# Altium PCB 宁波2号线PIS_数字功率放大器_网络音频(BHC-A-2030-02)_PCB(06001537)_V1.0.PcbDoc (part 4 of 7)
Units mm, origin at the board's own origin, x right, y up, seen from the top; angles counter-clockwise.
Board outline 86 x 96 mm, 4 copper layers (Top Layer, GND, VDD, Bottom Layer); 204 components, 185 nets, 781 pads, 267 vias.
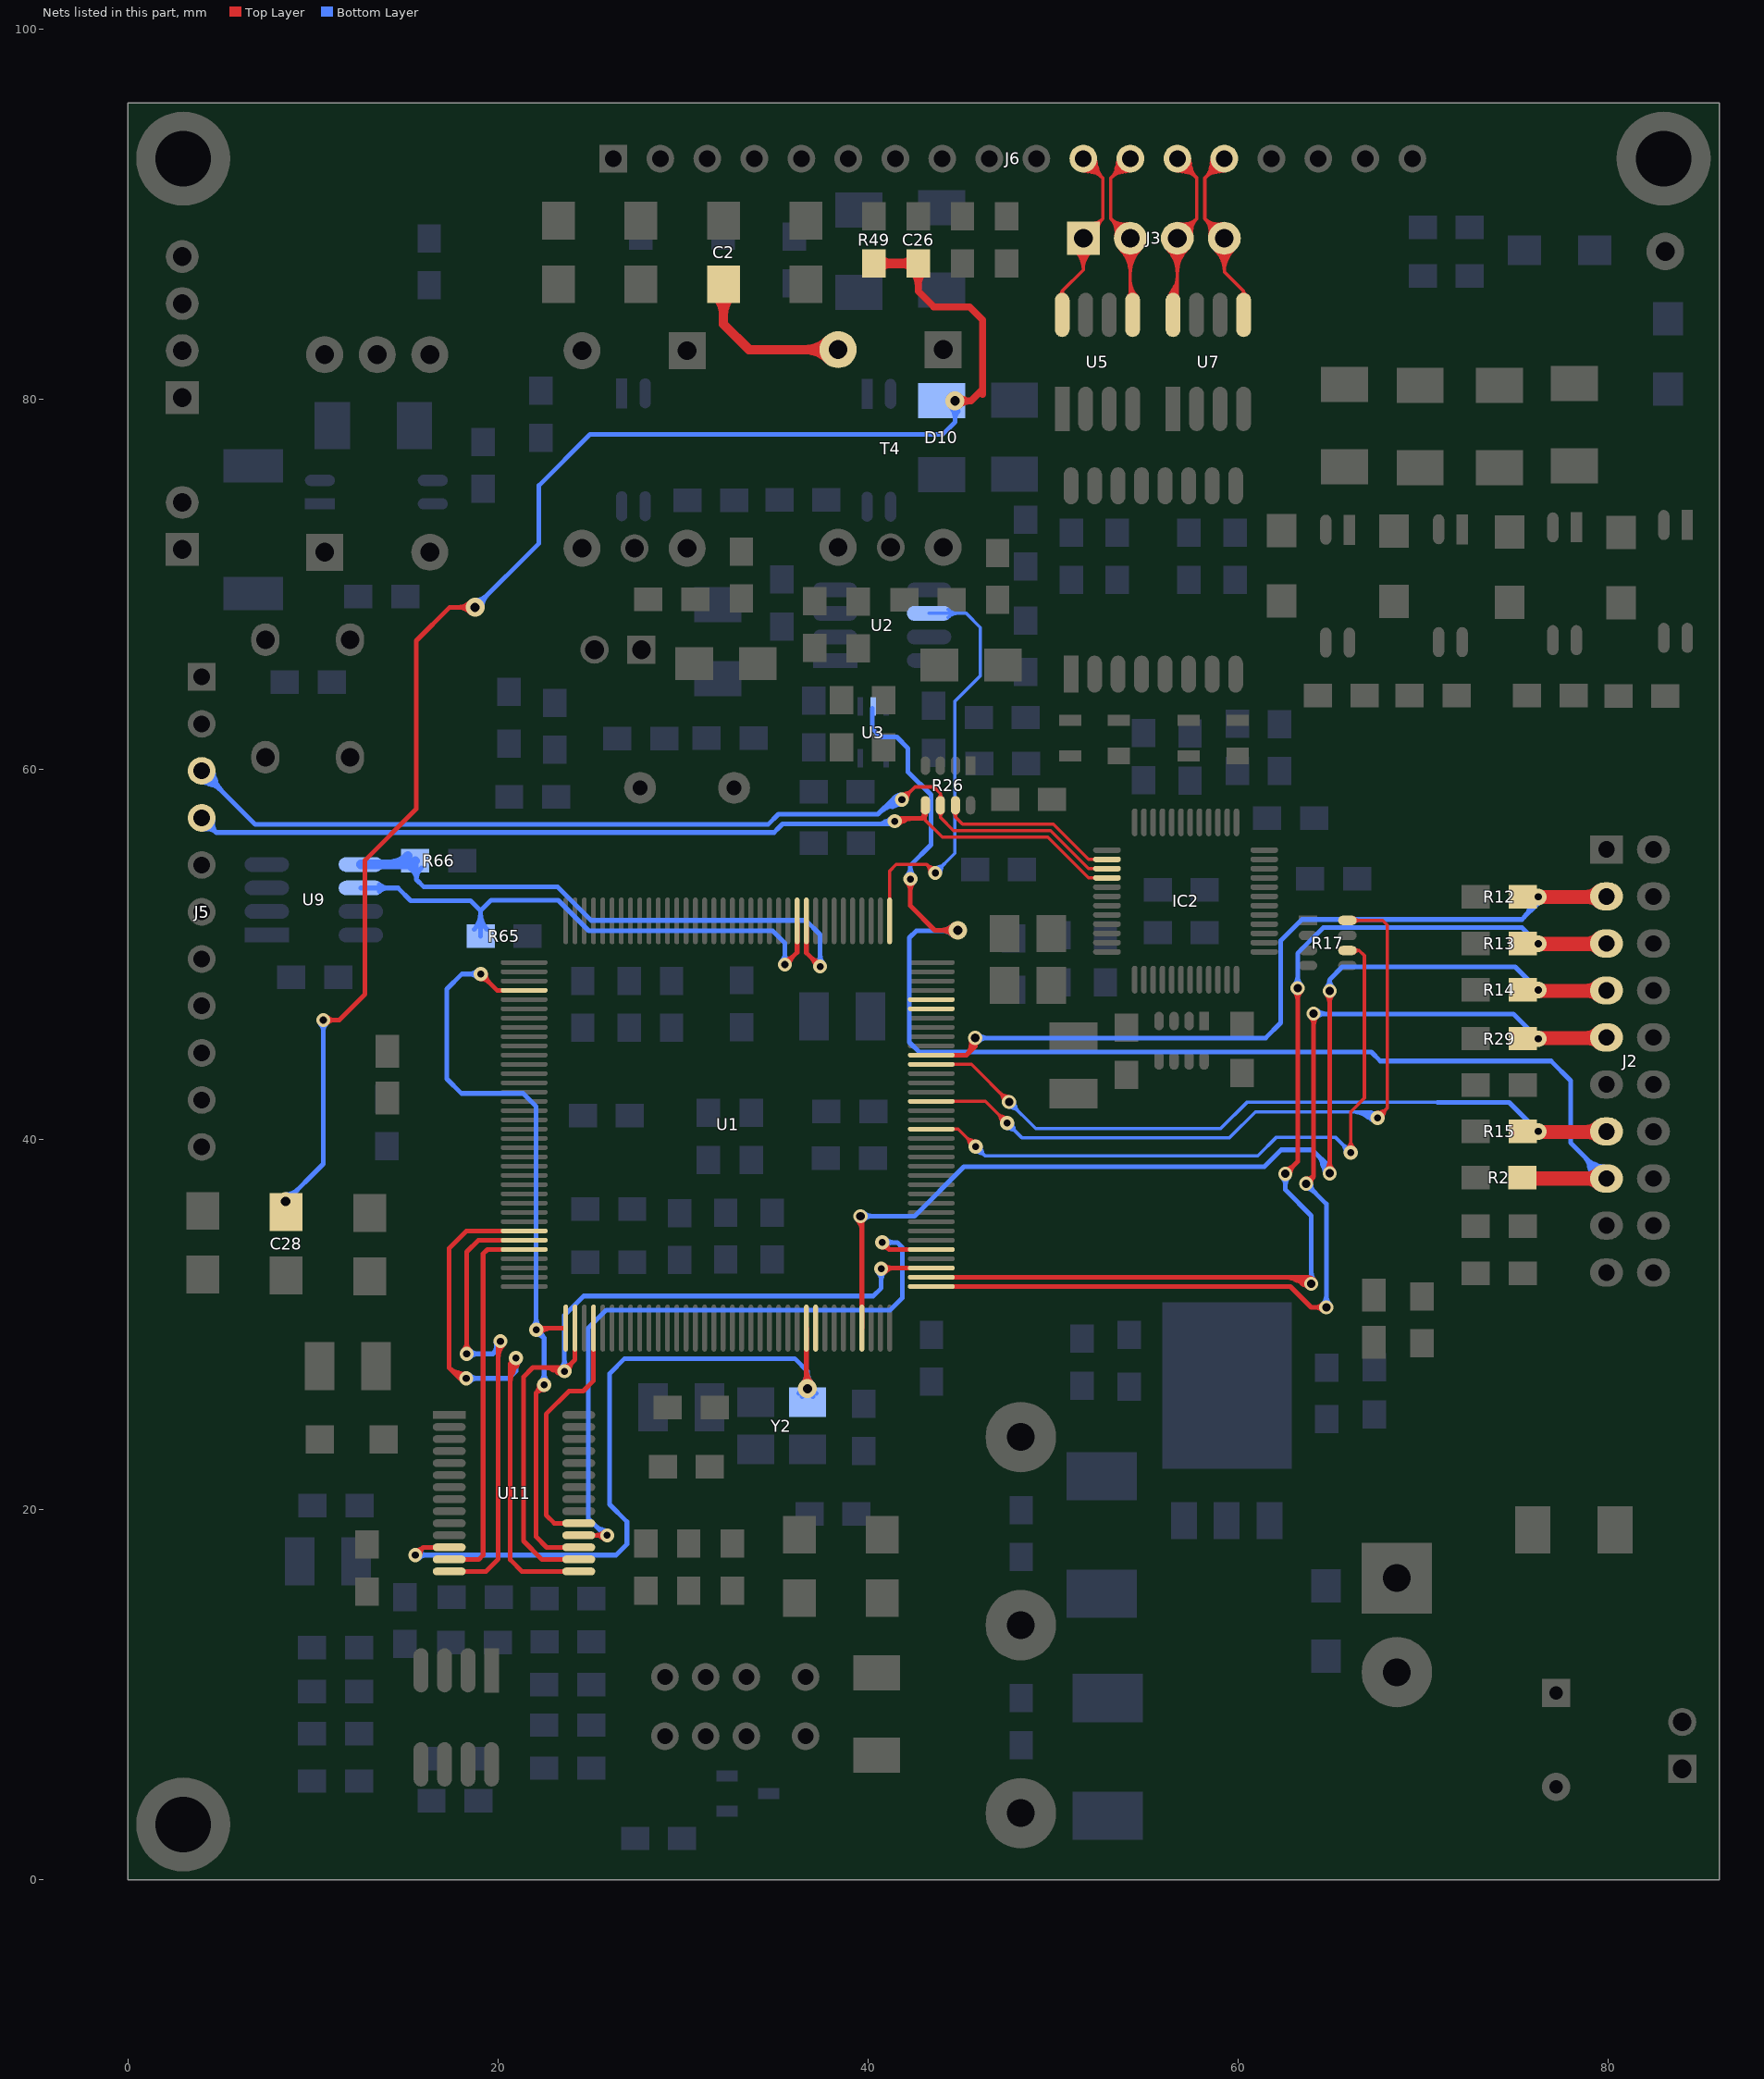
[diagram p6: the nets of this part, all layers, seen from the top]

## Via types
v1: diameter 1.016, hole 0.508, Top Layer to Bottom Layer, 122 vias
v2: diameter 0.762, hole 0.381, Top Layer to Bottom Layer, 48 vias
v3: diameter 0.889, hole 0.381, Top Layer to Bottom Layer, 37 vias
v4: diameter 1.27, hole 0.635, Top Layer to Bottom Layer, 28 vias
v5: diameter 1.27, hole 0.711, Top Layer to Bottom Layer, 20 vias
v6: diameter 0.762, hole 0.457, Top Layer to Bottom Layer, 11 vias
v7: diameter 1.143, hole 0.635, Top Layer to Bottom Layer, 1 vias

## Nets (pads, with @x,y where several pads share a name; then routed paths per layer and width w, separated by ;. In a path a pad name is that pad's centre, name@x,y a point inside that pad or via, vN(x,y) a via of type N, cw(c..) or ccw(c..) an arc to the next point about the centre after c; other vN are vias at no path point) (continued)
ETHTXD1: R17.8 U1.129 | length 59.5
  Top Layer w0.178: U1.129@43.423,42.066 46.351,42.066 v2(47.523,40.894) ; 47.159,41.163 ccw(c47.603,41.282) v2@47.511,40.832 ; 47.255,41.258 cw(c47.136,40.815) v2@47.586,40.907 ; R17.8@65.913,51.841 67.818,51.841 68.072,51.587 68.072,41.707 v2(67.539,41.173) ; v2@67.476,41.186 cw(c67.926,41.094) 67.807,41.538 ; v2@67.551,41.111 ccw(c67.459,41.561) 67.903,41.442 ; 47.025,41.393 cw(c46.526,40.894) 47.231,40.894 ccw(c46.526,40.894) 47.025,41.393 ; 47.025,41.393 ccw(c47.523,41.891) 47.523,41.186 cw(c47.523,41.891) 47.025,41.393 ; 66.558,51.841 cw(c66.558,52.24) 66.276,51.958 ccw(c66.558,52.24) 66.558,51.841 ; 66.558,51.841 ccw(c66.558,51.443) 66.276,51.725 cw(c66.558,51.443) 66.558,51.841 ; 68.037,41.672 cw(c67.539,42.171) 67.539,41.465 ccw(c67.539,42.171) 68.037,41.672 ; 68.037,41.672 ccw(c68.536,41.173) 67.831,41.173 cw(c68.536,41.173) 68.037,41.672
  Bottom Layer w0.178: v2@47.461,40.881 ccw(c47.911,40.973) 47.792,40.53 ; v2(47.523,40.894) 48.311,40.107 59.538,40.107 60.935,41.504 67.208,41.504 v2(67.539,41.173) ; v2@47.536,40.956 cw(c47.444,40.506) 47.888,40.625 ; 66.797,41.314 ccw(c67.025,41.666) v2@67.328,41.376 ; 66.884,41.424 ccw(c67.136,41.861) v2@67.391,41.425 ; 66.977,41.197 ccw(c67.183,41.514) v2@67.456,41.252 ; 67.104,41.297 cw(c66.939,41.013) v2@67.256,41.098 ; 67.149,41.271 ccw(c67.314,41.557) v2@67.481,41.272 ; 67.158,41.08 ccw(c67.341,41.363) v2@67.584,41.129 ; v2@67.249,41.214 ccw(c66.98,41.253) 67.116,41.488 ccw(c67.324,41.849) v2@67.45,41.452 ; 48.022,40.395 cw(c48.521,40.894) 47.816,40.894 ccw(c48.521,40.894) 48.022,40.395 ; 48.022,40.395 ccw(c47.523,39.897) 47.523,40.602 cw(c47.523,39.897) 48.022,40.395 ; 66.036,41.504 cw(c66.036,39.671) 67.332,40.967 ccw(c66.036,39.671) 66.036,41.504 ; 66.465,41.504 cw(c66.465,40.1) 67.458,41.093 ccw(c66.465,40.1) 66.465,41.504 ; 66.895,41.504 cw(c66.895,40.53) 67.584,41.218 ccw(c66.895,40.53) 66.895,41.504
ETHTXEN: R17.6 U1.126 | length 45.9
  Top Layer w0.178: U1.126@43.423,40.566 44.88,40.566 v2(45.822,39.624) ; 45.457,39.893 ccw(c45.901,40.012) v2@45.809,39.562 ; 45.553,39.988 cw(c45.434,39.545) v2@45.884,39.637 ; v2@65.884,39.5 ccw(c65.386,39.999) 66.091,39.999 ccw(c66.796,39.999) v2@66.297,39.5 ; R17.6@65.913,50.216 66.548,50.216 ; v2(66.091,39.294) 66.091,41.504 66.827,42.24 66.827,49.936 66.548,50.216 ; 45.323,40.123 cw(c44.824,39.624) 45.53,39.624 ccw(c44.824,39.624) 45.323,40.123 ; 45.323,40.123 ccw(c45.822,40.621) 45.822,39.916 cw(c45.822,40.621) 45.323,40.123 ; 66.548,50.216 cw(c66.548,50.591) 66.278,50.33 ccw(c66.548,50.591) 66.548,50.216 ; 66.548,50.216 ccw(c66.548,49.84) 66.278,50.101 cw(c66.548,49.84) 66.548,50.216
  Bottom Layer w0.178: v2@45.759,39.611 ccw(c46.209,39.703) 46.09,39.26 ; v2(45.822,39.624) 46.33,39.116 61.062,39.116 62.078,40.132 65.253,40.132 v2(66.091,39.294) ; v2@45.834,39.686 cw(c45.742,39.236) 46.186,39.355 ; v2@65.799,39.294 ccw(c65.094,39.294) 65.592,39.792 ccw(c66.091,40.291) v2@66.091,39.586 ; 46.32,39.125 cw(c46.819,39.624) 46.114,39.624 ccw(c46.819,39.624) 46.32,39.125 ; 46.32,39.125 ccw(c45.822,38.627) 45.822,39.332 cw(c45.822,38.627) 46.32,39.125
FEED_DOG: U1.1 U2.6 | length 30.3
  Top Layer w0.178: U1.1@41.173,51.816 41.173,54.508 41.529,54.864 43.18,54.864 ; 43.282,54.741 ccw(c43.805,54.846) v2@43.614,54.348 ; 43.303,54.762 cw(c43.198,54.239) v2@43.696,54.43 ; v2(43.637,54.407) 43.18,54.864 ; 43.18,54.864 cw(c42.777,54.461) 43.346,54.425 ccw(c42.777,54.461) 43.18,54.864 ; 43.18,54.864 ccw(c43.583,55.267) 43.619,54.698 cw(c43.583,55.267) 43.18,54.864
  Bottom Layer w0.178: U2.6@43.307,68.428 45.314,68.428 46.076,67.666 46.076,65.049 44.704,63.678 44.704,55.474 v2(43.637,54.407) ; v2@43.575,54.42 cw(c44.025,54.327) 43.906,54.771 ; v2@43.65,54.345 ccw(c43.558,54.794) 44.001,54.676 ; U2.6@44.327,68.208 cw(c44.858,67.677) 44.858,68.428 cw(c44.858,69.179) U2.6@44.327,68.648 ; 44.136,54.905 cw(c43.637,55.404) 43.637,54.699 ccw(c43.637,55.404) 44.136,54.905 ; 44.136,54.905 ccw(c44.634,54.407) 43.929,54.407 cw(c44.634,54.407) 44.136,54.905
I2C1_SCL: U1.139
I2C1_SDA: U1.140
I2C2_SCL: R65.2 U1.11 U9.6 | length 40.5
  Top Layer w0.254: 35.829,49.794 ccw(c35.944,49.365) v2(35.509,49.454) ; 35.849,49.774 cw(c35.42,49.889) v2(35.509,49.454) ; U1.11@36.173,51.816 36.173,50.118 v2(35.509,49.454) ; 35.943,49.887 cw(c35.509,50.321) 35.509,49.708 ccw(c35.509,50.321) 35.943,49.887 ; 35.943,49.887 ccw(c36.376,49.454) 35.763,49.454 cw(c36.376,49.454) 35.943,49.887
  Bottom Layer w0.254: U9.6@12.598,53.594 14.605,53.594 15.291,52.908 18.526,52.908 19.067,52.367 ; R65.2@19.067,50.994 19.067,52.367 ; v2(35.509,49.454) 35.509,50.622 34.849,51.283 24.917,51.283 23.266,52.934 19.634,52.934 19.067,52.367 ; 14.057,53.594 cw(c14.057,54.253) 13.591,53.787 ccw(c14.057,54.253) 14.057,53.594 ; 14.057,53.594 ccw(c14.057,52.935) 13.591,53.401 cw(c14.057,52.935) 14.057,53.594 ; 19.067,52.22 cw(c17.841,52.22) 18.708,51.353 ccw(c17.841,52.22) 19.067,52.22 ; 19.067,52.22 ccw(c20.294,52.22) 19.426,51.353 cw(c20.294,52.22) 19.067,52.22 ; 35.509,50.067 cw(c34.896,50.067) 35.33,49.633 ccw(c34.896,50.067) 35.509,50.067 ; 35.509,50.067 ccw(c36.122,50.067) 35.689,49.633 cw(c36.122,50.067) 35.509,50.067
I2C2_SDA: R66.2 U1.10 U9.5 | length 41.7
  Top Layer w0.254: U1.10@36.673,51.816 36.673,50.093 v2(37.414,49.352) ; 37.074,49.672 ccw(c37.503,49.787) v2(37.414,49.352) ; 37.094,49.692 cw(c36.979,49.263) v2(37.414,49.352) ; 36.981,49.786 cw(c36.547,49.352) 37.16,49.352 ccw(c36.547,49.352) 36.981,49.786 ; 36.981,49.786 ccw(c37.414,50.219) 37.414,49.606 cw(c37.414,50.219) 36.981,49.786
  Bottom Layer w0.254: R66.2@15.537,55.058 15.596,54.999 15.596,54.051 16.002,53.645 23.241,53.645 25.044,51.841 36.652,51.841 37.414,51.079 v2(37.414,49.352) ; 15.596,54.05 cw(c16.444,54.05) 15.876,54.68 ccw(c16.444,54.05) 15.596,54.05 ; 15.596,54.05 ccw(c14.924,54.05) 15.273,54.624 cw(c14.924,54.05) 15.596,54.05 ; 37.414,49.965 cw(c36.801,49.965) 37.235,49.532 ccw(c36.801,49.965) 37.414,49.965 ; 37.414,49.965 ccw(c38.027,49.965) 37.594,49.532 cw(c38.027,49.965) 37.414,49.965
  Bottom Layer w0.508: U9.5@12.598,54.864 15.343,54.864 R66.2@15.537,55.058 ; 14.022,54.864 ccw(c14.022,56.445) 15.14,55.327 cw(c14.022,56.445) 14.022,54.864
I2S2_CKIN: U1.99 U11.12 Y2.3 | length 57.7
  Top Layer w0.254: 15.88,17.892 cw(c15.427,18.002) v2(15.545,17.551) ; 15.886,17.886 ccw(c15.995,17.434) v2(15.545,17.551) ; U11.12@17.374,17.971 15.964,17.971 ; U1.99@36.673,29.816 36.673,26.598 v1(36.728,26.543) ; v2(15.545,17.551) 15.964,17.971 ; 15.964,17.971 cw(c15.565,18.37) 15.551,17.805 ccw(c15.565,18.37) 15.964,17.971 ; 15.964,17.971 ccw(c16.363,17.571) 15.799,17.558 cw(c16.363,17.571) 15.964,17.971 ; v1@36.459,26.812 ccw(c35.941,27.33) 36.673,27.33 cw(c35.941,27.33) v1@36.459,26.812 ; 36.673,27.596 ccw(c37.781,27.596) 36.998,26.812 cw(c37.781,27.596) 36.673,27.596
  Bottom Layer w0.254: v2(15.545,17.551) 26.391,17.551 26.975,18.136 26.975,19.355 26.035,20.295 26.035,27.356 26.848,28.169 36.043,28.169 36.728,27.483 v1(36.728,26.543) ; 16.158,17.551 cw(c16.158,18.165) 15.724,17.731 ccw(c16.158,18.165) 16.158,17.551 ; 16.158,17.551 ccw(c16.158,16.938) 15.724,17.372 cw(c16.158,16.938) 16.158,17.551 ; v1@36.728,26.818 cw(c35.717,26.818) 36.432,26.103 ccw(c35.717,26.818) v1@36.728,26.818 ; v1@36.728,26.818 ccw(c37.74,26.818) 37.025,26.103 cw(c37.74,26.818) v1@36.728,26.818 ; 36.728,27.431 cw(c35.104,27.431) 36.253,26.282 ccw(c35.104,27.431) 36.728,27.431 ; 36.728,27.431 ccw(c38.353,27.431) 37.204,26.282 cw(c38.353,27.431) 36.728,27.431 ; 36.728,27.463 cw(c35.809,27.463) 36.459,26.812 ccw(c35.809,27.463) 36.728,27.463 ; 36.728,27.463 ccw(c37.648,27.463) 36.998,26.812 cw(c37.648,27.463) 36.728,27.463
I2S2_SCK: U1.74 U1.111 U11.16 | length 54.4
  Top Layer w0.254: 22.954,27.571 ccw(c23.132,27.88) v2@23.404,27.648 ; 23.218,27.418 ccw(c23.368,27.678) v2(23.597,27.483) ; v2@23.749,27.686 24.173,28.11 U1.74@24.173,29.816 ; 23.886,27.814 ccw(c23.989,27.433) v2(23.597,27.483) ; 23.944,27.833 cw(c23.465,27.961) v2(23.597,27.483) ; U11.16@24.374,17.321 22.38,17.321 21.387,18.313 21.387,27.178 21.895,27.686 23.393,27.686 v2(23.597,27.483) ; v2@40.665,33.071 40.67,33.066 U1.111@43.423,33.066 ; v2(23.597,27.483) ccw(c23.106,26.992) 23.106,27.686 cw(c23.106,26.992) v2(23.597,27.483) ; 22.493,27.686 cw(c22.493,26.379) 23.417,27.303 ccw(c22.493,26.379) 22.493,27.686 ; v2@23.597,27.737 ccw(c23.597,28.227) 23.943,27.88 cw(c23.597,28.227) v2@23.597,27.737 ; v2@23.851,27.483 cw(c24.586,27.483) 24.066,28.003 ccw(c24.586,27.483) v2@23.851,27.483 ; v2@40.896,32.84 cw(c41.441,32.296) 41.441,33.066 ccw(c41.441,32.296) v2@40.896,32.84 ; v2@40.896,33.2 ccw(c41.218,33.522) 41.218,33.066 cw(c41.218,33.522) v2@40.896,33.2
  Bottom Layer w0.254: v2(23.597,27.483) 23.597,30.505 24.638,31.547 40.284,31.547 40.716,31.979 v2(40.716,33.02) ; 23.597,28.096 cw(c22.983,28.096) 23.417,27.662 ccw(c22.983,28.096) 23.597,28.096 ; 23.597,28.096 ccw(c24.21,28.096) 23.776,27.662 cw(c24.21,28.096) 23.597,28.096 ; 40.716,32.407 cw(c41.329,32.407) 40.896,32.84 ccw(c41.329,32.407) 40.716,32.407 ; 40.716,32.407 ccw(c40.103,32.407) 40.537,32.84 cw(c40.103,32.407) 40.716,32.407
I2S2_SD: U1.76 U11.19 | length 13.6
  Top Layer w0.254: U11.19@24.374,19.271 23.046,19.271 22.606,19.71 22.606,25.171 23.851,26.416 24.613,26.416 25.173,26.977 U1.76@25.173,29.816
I2S2_WS: U1.40 U1.73 U11.17 | length 58.4
  Top Layer w0.254: 19.395,48.606 cw(c19.51,49.035) v2(19.075,48.946) ; 19.415,48.626 ccw(c18.986,48.511) v2(19.075,48.946) ; U1.40@21.423,48.066 19.955,48.066 v2(19.075,48.946) ; v2(22.073,29.718) 22.171,29.816 U1.73@23.673,29.816 ; 22.165,26.424 cw(c22.597,26.31) v2(22.504,26.746) ; 22.182,26.407 ccw(c22.068,26.838) v2(22.504,26.746) ; U11.17@24.374,17.971 22.644,17.971 22.073,18.542 22.073,26.314 ; 19.509,48.512 cw(c19.943,48.946) 19.329,48.946 ccw(c19.943,48.946) 19.509,48.512 ; 19.509,48.512 ccw(c19.075,48.079) 19.075,48.692 cw(c19.075,48.079) 19.509,48.512 ; 22.073,26.314 cw(c22.502,25.885) 22.504,26.492 ccw(c22.502,25.885) 22.073,26.314 ; 22.073,26.314 ccw(c21.643,26.744) 22.25,26.745 cw(c21.643,26.744) 22.073,26.314 ; 22.073,26.314 v2(22.504,26.746) ; v2@22.252,29.538 cw(c22.922,28.868) 22.922,29.816 ccw(c22.922,28.868) v2@22.252,29.538 ; v2@22.252,29.898 ccw(c22.449,30.095) 22.449,29.816 cw(c22.449,30.095) v2@22.252,29.898
  Bottom Layer w0.254: v2(19.075,48.946) 18.059,48.946 17.247,48.133 17.247,43.282 18.034,42.494 21.361,42.494 22.073,41.783 v2(22.073,29.718) 22.504,29.286 ; v2(22.504,26.746) 22.504,29.286 ; 18.462,48.946 cw(c18.462,48.333) 18.896,48.766 ccw(c18.462,48.333) 18.462,48.946 ; 18.462,48.946 ccw(c18.462,49.559) 18.896,49.125 cw(c18.462,49.559) 18.462,48.946 ; 22.073,30.331 cw(c21.459,30.331) 21.893,29.898 ccw(c21.459,30.331) 22.073,30.331 ; 22.073,30.331 ccw(c22.686,30.331) 22.252,29.898 cw(c22.686,30.331) 22.073,30.331 ; 22.504,27.359 cw(c21.891,27.359) 22.325,26.926 ccw(c21.891,27.359) 22.504,27.359 ; 22.504,27.359 ccw(c23.118,27.359) 22.684,26.926 cw(c23.118,27.359) 22.504,27.359 ; 22.504,29.286 cw(c22.934,29.715) 22.327,29.717 ccw(c22.934,29.715) 22.504,29.286 ; 22.504,29.286 ccw(c22.075,28.857) 22.073,29.464 cw(c22.075,28.857) 22.504,29.286
I2S3_SD: U1.113 U11.18 | length 45.5
  Top Layer w0.254: U11.18@24.374,18.621 24.376,18.618 v2@26.086,18.618 ; v2(40.767,34.442) 41.143,34.066 ; U1.113@43.423,34.066 41.143,34.066 ; 25.295,18.618 cw(c25.295,18.005) 25.728,18.439 ccw(c25.295,18.005) 25.295,18.618 ; 25.295,18.618 ccw(c25.295,19.231) 25.728,18.798 cw(c25.295,19.231) 25.295,18.618 ; 41.143,34.066 cw(c41.448,34.371) 41.02,34.416 ccw(c41.448,34.371) 41.143,34.066 ; 41.143,34.066 ccw(c40.839,33.762) 40.794,34.19 cw(c40.839,33.762) 41.143,34.066
  Bottom Layer w0.254: 25.528,18.974 cw(c25.385,18.44) v2(25.908,18.618) ; v2@25.806,18.618 24.892,19.533 24.892,29.82 25.857,30.785 41.199,30.785 41.859,31.445 41.859,34.163 41.58,34.442 v2(40.767,34.442) ; 41.38,34.442 cw(c41.38,35.056) 40.947,34.622 ccw(c41.38,35.056) 41.38,34.442 ; 41.38,34.442 ccw(c41.38,33.829) 40.947,34.263 cw(c41.38,33.829) 41.38,34.442 ; 25.301,19.124 ccw(c25.908,19.731) 25.908,18.872 cw(c25.908,19.731) 25.301,19.124 ; 25.546,18.878 cw(c25.286,18.618) 25.654,18.618 ccw(c25.286,18.618) 25.546,18.878
I_SAMPLING_UDA1341TS: C26.2 C28.2 D10.K R49.2 | length 109.1
  Top Layer w0.254: C28.2@9.017,36.093 C28.2@9.038,36.114 ; v2(10.566,46.457) 11.43,46.457 12.827,47.854 12.827,55.093 15.596,57.861 15.596,66.954 17.399,68.758 v1(18.771,68.758) ; v2@10.746,46.277 cw(c11.18,45.843) 11.18,46.457 cw(c11.18,47.07) v2@10.746,46.636 ; 17.851,68.758 cw(c17.851,67.838) 18.501,68.488 ccw(c17.851,67.838) 17.851,68.758 ; 17.851,68.758 ccw(c17.851,69.678) 18.501,69.027 cw(c17.851,69.678) 17.851,68.758
  Top Layer w0.381: C26.2@42.716,87.334 42.716,85.833 43.561,84.988 45.491,84.988 46.203,84.277 46.203,80.543 ; v1(44.704,79.908) 45.568,79.908 46.203,80.543 ; 46.203,80.264 46.203,80.543 ; 42.716,86.134 cw(c43.789,86.134) 43.03,86.893 ccw(c43.789,86.134) 42.716,86.134 ; 42.716,86.134 ccw(c41.643,86.134) 42.402,86.893 cw(c41.643,86.134) 42.716,86.134 ; 45.471,79.908 cw(c45.471,80.675) 44.929,80.133 ccw(c45.471,80.675) 45.471,79.908 ; 45.471,79.908 ccw(c45.471,79.142) 44.929,79.684 cw(c45.471,79.142) 45.471,79.908
  Top Layer w0.508: R49.2@40.326,87.334 C26.2@42.716,87.334 ; 41.246,87.334 cw(c41.246,88.254) 40.595,87.604 ccw(c41.246,88.254) 41.246,87.334 ; 41.246,87.334 ccw(c41.246,86.415) 40.595,87.065 cw(c41.246,86.415) 41.246,87.334 ; 41.796,87.334 cw(c41.796,86.415) 42.447,87.065 ccw(c41.796,86.415) 41.796,87.334 ; 41.796,87.334 ccw(c41.796,88.254) 42.447,87.604 cw(c41.796,88.254) 41.796,87.334
  Bottom Layer w0.254: v1(8.534,36.652) 10.566,38.684 v2(10.566,46.457) ; v1@8.534,37.033 ccw(c8.534,37.953) 9.185,37.303 ccw(c9.835,36.652) v1@8.915,36.652 ; v2@10.387,46.277 cw(c9.953,45.843) 10.566,45.843 cw(c11.18,45.843) v2@10.746,46.277 ; v1(18.771,68.758) 22.225,72.212 22.225,75.336 24.994,78.105 44.044,78.105 44.704,78.765 v1(44.704,79.908) ; 19.421,69.408 cw(c18.771,70.059) 18.771,69.139 ccw(c18.771,70.059) 19.421,69.408 ; 19.421,69.408 ccw(c20.071,68.758) 19.152,68.758 cw(c20.071,68.758) 19.421,69.408 ; D10.K@44.704,78.989 cw(c45.624,78.989) 44.973,79.639 ccw(c45.624,78.989) D10.K@44.704,78.989 ; D10.K@44.704,78.989 ccw(c43.784,78.989) 44.435,79.639 cw(c43.784,78.989) D10.K@44.704,78.989 ; 44.704,78.916 cw(c45.309,78.916) 44.881,79.343 ccw(c45.309,78.916) 44.704,78.916
J_RST: J2.15 R2.2 U3.2 | length 98.7
  Top Layer w0.254: v2@42.291,54.204 42.291,52.629 43.612,51.308 v1(44.856,51.308) ; v1@44.587,51.039 ccw(c43.937,50.388) 43.937,51.308 ccw(c43.937,52.228) v1@44.587,51.577 ; 42.291,53.463 cw(c42.904,53.463) 42.471,53.897 ccw(c42.904,53.463) 42.291,53.463 ; 42.291,53.463 ccw(c41.678,53.463) 42.111,53.897 cw(c41.678,53.463) 42.291,53.463
  Top Layer w0.762: R2.2@75.37,37.938 75.411,37.897 J2.15@79.908,37.897 ; R2.2@75.677,38.118 ccw(c76.21,38.651) 76.21,37.897 ; 78.862,37.897 cw(c78.862,36.977) 79.512,37.627 ccw(c78.862,36.977) 78.862,37.897 ; 78.862,37.897 ccw(c78.862,38.817) 79.512,38.166 cw(c78.862,38.817) 78.862,37.897
  Bottom Layer w0.254: U3.2@40.244,63.297 40.244,62.194 40.691,61.747 41.554,61.747 42.164,61.138 42.164,59.868 43.409,58.623 43.409,55.931 42.291,54.813 v2@42.291,54.204 ; 43.875,51.283 ccw(c43.875,52.289) v1@44.587,51.577 ; 43.998,51.283 cw(c43.998,50.45) v1@44.587,51.039 ; v1@44.856,51.283 42.621,51.283 42.24,50.902 42.24,45.263 42.774,44.729 67.208,44.729 67.691,44.247 76.911,44.247 77.978,43.18 77.978,39.827 J2.15@79.908,37.897 ; 42.291,54.69 cw(c41.678,54.69) 42.111,54.256 ccw(c41.678,54.69) 42.291,54.69 ; 42.291,54.69 ccw(c42.904,54.69) 42.471,54.256 cw(c42.904,54.69) 42.291,54.69 ; 78.608,39.198 cw(c77.307,37.897) J2.15@79.146,37.897 ; 78.608,39.198 cw(c77.307,37.897) J2.15@79.146,37.897 ; 78.608,39.198 cw(c77.307,37.897) J2.15@79.146,37.897 ; 78.914,38.891 ccw(c79.781,39.758) J2.15@79.781,38.532 ; 78.914,38.891 ccw(c79.781,39.758) J2.15@79.781,38.532 ; 78.914,38.891 ccw(c79.781,39.758) J2.15@79.781,38.532 ; 78.969,38.558 ccw(c80.042,38.846) J2.15@79.748,37.774 ; 78.969,38.558 ccw(c80.042,38.846) J2.15@79.748,37.774 ; 78.969,38.558 ccw(c80.042,38.846) J2.15@79.748,37.774 ; 79.041,38.764 cw(c78.174,37.897) J2.15@79.4,37.897 ; 79.041,38.764 cw(c78.174,37.897) J2.15@79.4,37.897 ; 79.041,38.764 cw(c78.174,37.897) J2.15@79.4,37.897 ; 79.24,38.677 cw(c79.004,37.797) J2.15@79.907,37.913 ; 79.24,38.677 cw(c79.004,37.797) J2.15@79.907,37.913 ; 79.24,38.677 cw(c79.004,37.797) J2.15@79.907,37.913
  other v2: 42.291,54.077
JNRST: J2.3 R12.1 U1.134 | length 60.5
  Top Layer w0.254: U1.134@43.423,44.566 45.328,44.566 ; 45.558,44.896 cw(c46.396,44.907) v6(45.796,45.491) ; 45.328,44.566 ccw(c44.709,45.185) 45.552,45.423 cw(c44.709,45.185) 45.328,44.566 ; 45.328,44.566 45.796,45.034 ; 45.796,45.034 cw(c46.081,45.034) 45.93,45.276 ccw(c46.081,45.034) 45.796,45.034 ; 45.796,45.034 ccw(c45.512,45.034) 45.662,45.276 cw(c45.512,45.034) 45.796,45.034 ; 45.796,45.034 v6(45.796,45.491) ; v6(45.796,45.491) cw(c45.187,45.32) 45.635,44.873 ccw(c45.187,45.32) v6(45.796,45.491)
  Top Layer w0.762: R12.1@75.379,53.106 J2.3@79.877,53.106 ; R12.1@75.686,53.3 ccw(c76.156,53.771) 76.156,53.106 cw(c76.156,53.771) R12.1@75.686,53.3 ; 78.786,53.106 ccw(c78.786,54.132) 79.512,53.406 cw(c78.786,54.132) 78.786,53.106 ; 78.937,53.106 cw(c78.937,52.292) 79.512,52.867 ccw(c78.937,52.292) 78.937,53.106
  Bottom Layer w0.254: v6(45.796,45.491) 61.493,45.491 62.306,46.304 62.306,50.749 63.449,51.892 75.336,51.892 76.225,52.781 v3(76.225,53.111) ; 75.711,52.376 cw(c76.757,52.095) v3@76.255,53.055 ; v3@75.951,52.951 cw(c75.478,52.675) 76.007,52.534 cw(c76.365,52.438) v3@76.29,52.801 ; 46.409,45.491 cw(c46.409,46.105) 45.976,45.671 ccw(c46.409,46.105) 46.409,45.491 ; 46.409,45.491 ccw(c46.409,44.878) 45.976,45.312 cw(c46.409,44.878) 46.409,45.491 ; 75.45,52.006 ccw(c74.344,53.111) 75.908,53.111 cw(c74.344,53.111) 75.45,52.006 ; 75.884,52.439 ccw(c75.211,53.111) 76.162,53.111 cw(c75.211,53.111) 75.884,52.439
JTCK: J2.9 R29.2 U1.109 | length 74.3
  Top Layer w0.254: U1.109@43.423,32.066 62.825,32.066 63.954,30.937 v6(64.77,30.937) ; 64.009,37.984 cw(c63.524,38.089) v6(63.678,37.617) ; 64.044,37.948 ccw(c64.15,37.463) v6(63.678,37.617) ; v6(64.084,46.812) 64.084,38.024 ; v6(63.678,37.617) 64.084,38.024 ; 64.084,38.024 cw(c63.714,38.394) 63.69,37.871 ccw(c63.714,38.394) 64.084,38.024 ; 64.084,38.024 ccw(c64.454,37.654) 63.932,37.629 cw(c64.454,37.654) 64.084,38.024 ; 64.084,46.199 cw(c64.697,46.199) 64.264,46.633 ccw(c64.697,46.199) 64.084,46.199 ; 64.084,46.199 ccw(c63.471,46.199) 63.905,46.633 cw(c63.471,46.199) 64.084,46.199 ; 64.157,30.937 cw(c64.157,30.324) 64.59,30.758 ccw(c64.157,30.324) 64.157,30.937 ; 64.157,30.937 ccw(c64.157,31.55) 64.59,31.117 cw(c64.157,31.55) 64.157,30.937
  Top Layer w0.762: R29.2@75.379,45.486 J2.9@79.877,45.486 ; R29.2@75.686,45.277 cw(c76.189,44.773) 76.189,45.486 ccw(c76.189,44.773) R29.2@75.686,45.277 ; 78.786,45.486 ccw(c78.786,46.512) 79.512,45.786 cw(c78.786,46.512) 78.786,45.486 ; 78.937,45.486 cw(c78.937,44.672) 79.512,45.247 ccw(c78.937,44.672) 78.937,45.486
  Bottom Layer w0.254: v6(63.678,37.617) 64.77,36.525 v6(64.77,30.937) ; v6(64.084,46.812) 64.11,46.787 74.886,46.787 v3(76.225,45.447) ; 64.111,37.184 cw(c64.545,37.617) 63.932,37.617 ccw(c64.545,37.617) 64.111,37.184 ; 64.111,37.184 ccw(c63.678,36.75) 63.678,37.363 cw(c63.678,36.75) 64.111,37.184 ; 64.77,31.55 cw(c64.157,31.55) 64.59,31.117 ccw(c64.157,31.55) 64.77,31.55 ; 64.77,31.55 ccw(c65.383,31.55) 64.95,31.117 cw(c65.383,31.55) 64.77,31.55 ; 75.683,45.989 cw(c75.141,45.447) 75.908,45.447 ccw(c75.141,45.447) 75.683,45.989 ; 75.683,45.989 ccw(c76.225,46.531) 76.225,45.765 cw(c76.225,46.531) 75.683,45.989 ; v6@64.264,46.633 cw(c64.636,46.26) 64.636,46.787 ccw(c64.636,46.26) v6@64.264,46.633 ; v6@64.264,46.992 ccw(c64.759,47.487) 64.759,46.787 cw(c64.759,47.487) v6@64.264,46.992
JTDI: J2.5 R13.2 U1.110 | length 84.3
  Top Layer w0.254: U1.110@43.423,32.566 63.598,32.566 ; 62.88,38.491 ccw(c62.995,38.062) v6(62.56,38.151) ; 62.9,38.471 cw(c62.471,38.586) v6(62.56,38.151) ; 63.076,32.433 ccw(c63.458,33.094) v6@63.833,32.429 ; v6(63.221,48.184) 63.221,38.811 v6(62.56,38.151) ; 63.462,32.21 ccw(c63.712,32.643) v6(63.957,32.207) ; v6@63.712,32.141 ccw(c63.12,31.983) 63.426,32.514 ccw(c63.733,33.045) v6@63.891,32.453 ; 62.994,38.584 cw(c62.56,39.018) 62.56,38.405 ccw(c62.56,39.018) 62.994,38.584 ; 62.994,38.584 ccw(c63.427,38.151) 62.814,38.151 cw(c63.427,38.151) 62.994,38.584 ; 63.221,47.571 cw(c63.834,47.571) 63.4,48.004 ccw(c63.834,47.571) 63.221,47.571 ; 63.221,47.571 ccw(c62.607,47.571) 63.041,48.004 cw(c62.607,47.571) 63.221,47.571 ; 63.598,32.566 cw(c63.33,32.297) 63.706,32.243 ccw(c63.33,32.297) 63.598,32.566 ; 63.598,32.566 ccw(c63.867,32.835) 63.921,32.459 cw(c63.867,32.835) 63.598,32.566 ; 63.598,32.566 v6(63.957,32.207) ; v6(63.957,32.207) ccw(c63.091,31.341) 63.091,32.566 cw(c63.091,31.341) v6(63.957,32.207) ; 62.478,32.566 cw(c62.478,30.728) 63.778,32.028 ccw(c62.478,30.728) 62.478,32.566 ; 63.704,32.566 cw(c63.704,31.954) 64.137,32.387 ccw(c63.704,31.954) 63.704,32.566
  Top Layer w0.762: R13.2@75.379,50.566 J2.5@79.877,50.566 ; R13.2@75.686,50.767 ccw(c76.172,51.253) 76.172,50.566 cw(c76.172,51.253) R13.2@75.686,50.767 ; 78.786,50.566 ccw(c78.786,51.592) 79.512,50.866 cw(c78.786,51.592) 78.786,50.566 ; 78.937,50.566 cw(c78.937,49.752) 79.512,50.327 ccw(c78.937,49.752) 78.937,50.566
  Bottom Layer w0.254: v6(62.56,38.151) 62.56,37.287 63.957,35.89 v6(63.957,32.207) ; v6(63.221,48.184) 63.221,50.063 64.618,51.46 75.343,51.46 v3(76.225,50.578) ; 62.56,37.538 cw(c63.173,37.538) 62.74,37.971 ccw(c63.173,37.538) 62.56,37.538 ; 62.56,37.538 ccw(c61.947,37.538) 62.381,37.971 cw(c61.947,37.538) 62.56,37.538 ; 63.221,48.797 cw(c62.607,48.797) 63.041,48.363 ccw(c62.607,48.797) 63.221,48.797 ; 63.221,48.797 ccw(c63.834,48.797) 63.4,48.363 cw(c63.834,48.797) 63.221,48.797 ; 63.957,32.82 cw(c63.344,32.82) 63.778,32.387 ccw(c63.344,32.82) 63.957,32.82 ; 63.957,32.82 ccw(c64.57,32.82) 64.137,32.387 cw(c64.57,32.82) 63.957,32.82 ; 75.683,51.12 cw(c75.141,50.578) 75.908,50.578 ccw(c75.141,50.578) 75.683,51.12 ; 75.683,51.12 ccw(c76.225,51.662) 76.225,50.896 cw(c76.225,51.662) 75.683,51.12
JTDO: J2.13 R15.1 U1.133 | length 52.9
  Top Layer w0.178: U1.133@43.423,44.066 45.596,44.066 v6(47.625,42.037) ; 47.261,42.306 ccw(c47.704,42.425) v6@47.612,41.975 ; 47.356,42.401 cw(c47.237,41.958) v6@47.687,42.05 ; 47.126,42.536 cw(c46.628,42.037) 47.333,42.037 ccw(c46.628,42.037) 47.126,42.536 ; 47.126,42.536 ccw(c47.625,43.034) 47.625,42.329 cw(c47.625,43.034) 47.126,42.536
  Top Layer w0.762: R15.1@75.379,40.406 J2.13@79.877,40.406 ; R15.1@75.686,40.626 ccw(c76.217,41.158) 76.217,40.406 cw(c76.217,41.158) R15.1@75.686,40.626 ; 78.786,40.406 ccw(c78.786,41.432) 79.512,40.706 cw(c78.786,41.432) 78.786,40.406 ; 78.937,40.406 cw(c78.937,39.592) 79.512,40.167 ccw(c78.937,39.592) 78.937,40.406
  Bottom Layer w0.178: v6@47.563,42.024 ccw(c48.013,42.116) 47.894,41.673 ; v6(47.625,42.037) 49.073,40.589 49.632,40.589 59.055,40.589 60.477,42.012 70.79,42.012 ; v6@47.638,42.099 cw(c47.546,41.649) 47.989,41.768 ; 48.124,41.538 cw(c48.622,42.037) 47.917,42.037 ccw(c48.622,42.037) 48.124,41.538 ; 48.124,41.538 ccw(c47.625,41.04) 47.625,41.745 cw(c47.625,41.04) 48.124,41.538
  Bottom Layer w0.254: 70.79,42.012 74.651,42.012 v3(76.225,40.437) ; 75.683,40.979 cw(c75.141,40.437) 75.908,40.437 ccw(c75.141,40.437) 75.683,40.979 ; 75.683,40.979 ccw(c76.225,41.521) 76.225,40.754 cw(c76.225,41.521) 75.683,40.979
JTMS: J2.7 R14.1 U1.105 | length 79.6
  Top Layer w0.254: v6@39.419,35.685 cw(c38.805,35.071) 39.673,35.071 ; v6(39.599,35.865) 39.673,35.79 U1.105@39.673,29.816 ; 39.673,35.432 cw(c40.031,35.432) v6@39.778,35.685 ; v6(64.948,38.176) v6(64.948,48.031) ; 64.948,38.789 cw(c64.335,38.789) 64.768,38.356 ccw(c64.335,38.789) 64.948,38.789 ; 64.948,38.789 ccw(c65.561,38.789) 65.127,38.356 cw(c65.561,38.789) 64.948,38.789 ; 64.948,47.418 cw(c65.561,47.418) 65.127,47.852 ccw(c65.561,47.418) 64.948,47.418 ; 64.948,47.418 ccw(c64.335,47.418) 64.768,47.852 cw(c64.335,47.418) 64.948,47.418
  Top Layer w0.762: R14.1@75.379,48.026 J2.7@79.877,48.026 ; R14.1@75.686,48.271 ccw(c76.279,48.864) 76.279,48.026 cw(c76.279,48.864) R14.1@75.686,48.271 ; 78.786,48.026 ccw(c78.786,49.052) 79.512,48.326 cw(c78.786,49.052) 78.786,48.026 ; 78.937,48.026 cw(c78.937,47.212) 79.512,47.787 ccw(c78.937,47.212) 78.937,48.026
  Bottom Layer w0.254: v6(39.599,35.865) 42.52,35.865 45.187,38.532 61.417,38.532 62.332,39.446 64.008,39.446 64.948,38.506 v6(64.948,38.176) ; v6@39.778,35.685 cw(c40.212,35.252) 40.212,35.865 cw(c40.212,36.478) v6@39.778,36.044 ; 64.558,38.685 ccw(c65.367,38.902) v6(64.948,38.176) ; v6@64.779,38.366 ccw(c64.64,38.521) 64.841,38.575 ccw(c65.042,38.629) v6@65,38.425 ; v6(64.948,48.031) 64.948,48.641 ; v3(76.225,48.082) 74.981,49.327 65.634,49.327 64.948,48.641 ; v6(64.948,38.176) ccw(c64.151,38.176) 64.714,38.74 cw(c64.151,38.176) v6(64.948,38.176) ; 64.948,48.641 cw(c64.343,48.641) 64.769,48.212 ccw(c64.343,48.641) 64.948,48.641 ; 64.948,48.641 ccw(c65.552,48.641) 65.127,48.212 cw(c65.552,48.641) 64.948,48.641 ; 75.683,48.624 cw(c75.141,48.082) 75.908,48.082 ccw(c75.141,48.082) 75.683,48.624 ; 75.683,48.624 ccw(c76.225,49.166) 76.225,48.4 cw(c76.225,49.166) 75.683,48.624 ; 64.281,39.173 cw(c63.283,38.176) 64.694,38.176 ccw(c63.283,38.176) 64.281,39.173
L3CLK: U1.67 U11.14 | length 33.6
  Top Layer w0.254: U11.14@17.374,16.671 19.355,16.671 20.015,17.331 20.015,28.981 v2(20.142,29.108) ; v2(18.313,28.423) 18.313,33.931 18.948,34.566 U1.67@21.423,34.566 ; 18.313,29.036 cw(c17.7,29.036) 18.134,28.602 ccw(c17.7,29.036) 18.313,29.036 ; 18.313,29.036 ccw(c18.927,29.036) 18.493,28.602 cw(c18.927,29.036) 18.313,29.036 ; 20.015,28.189 cw(c21.062,28.189) 20.322,28.929 ccw(c21.062,28.189) 20.015,28.189
  Bottom Layer w0.254: v2(18.313,28.423) 19.736,28.423 ; 18.927,28.423 cw(c18.927,29.036) 18.493,28.602 ccw(c18.927,29.036) 18.927,28.423 ; 18.927,28.423 ccw(c18.927,27.809) 18.493,28.243 cw(c18.927,27.809) 18.927,28.423 ; 19.736,28.423 ccw(c19.289,28.87) 19.898,29.04 cw(c19.289,28.87) 19.736,28.423 ; 19.736,28.423 20.142,28.829 v2(20.142,29.108) ; v2(20.142,29.108) cw(c19.769,29.004) 20.043,28.73 ccw(c19.769,29.004) v2(20.142,29.108)
L3DATA: U1.66 U11.15 | length 45.4
  Top Layer w0.254: 17.737,27.429 cw(c17.617,26.6) v2(18.288,27.102) ; v2@20.742,28.105 cw(c20.326,27.95) 20.711,27.728 cw(c21.096,27.505) v2@21.022,27.943 ; v2@20.773,28.047 cw(c20.279,27.698) 20.803,27.396 ; 21.001,27.739 ccw(c20.636,27.95) v2(20.98,28.194) ; U1.66@21.423,35.066 18.302,35.066 17.374,34.138 17.374,27.661 ; U11.15@24.374,16.671 21.302,16.671 20.676,17.297 20.676,27.889 ; 17.374,27.661 ccw(c18.132,28.419) 18.258,27.354 cw(c18.132,28.419) 17.374,27.661 ; 17.374,27.661 17.932,27.102 v2(18.288,27.102) ; v2(18.288,27.102) cw(c18.21,27.757) 17.744,27.29 ccw(c18.21,27.757) v2(18.288,27.102) ; 20.676,27.889 cw(c20.844,27.72) 20.91,27.95 ccw(c20.844,27.72) 20.676,27.889 ; 20.676,27.889 ccw(c20.507,28.058) 20.736,28.124 cw(c20.507,28.058) 20.676,27.889 ; 20.676,27.889 v2(20.98,28.194) ; v2(20.98,28.194) ccw(c21.716,27.458) 20.676,27.458 cw(c21.716,27.458) v2(20.98,28.194) ; 20.676,26.845 cw(c22.329,26.845) 21.16,28.014 ccw(c22.329,26.845) 20.676,26.845
  Bottom Layer w0.254: v2(18.288,27.102) 20.599,27.102 20.98,27.483 v2(20.98,28.194) ; 18.901,27.102 cw(c18.901,27.715) 18.468,27.281 ccw(c18.901,27.715) 18.901,27.102 ; 18.901,27.102 ccw(c18.901,26.489) 18.468,26.922 cw(c18.901,26.489) 18.901,27.102 ; 20.98,27.581 cw(c21.594,27.581) 21.16,28.014 ccw(c21.594,27.581) 20.98,27.581 ; 20.98,27.581 ccw(c20.367,27.581) 20.801,28.014 cw(c20.367,27.581) 20.98,27.581
L3MODE: U1.68 U11.13 | length 20.5
  Top Layer w0.254: U11.13@17.374,17.321 18.974,17.321 19.202,17.549 19.202,33.833 19.436,34.066 U1.68@21.423,34.066
LEDACT: IC2.26 R26.7 | length 11
  Top Layer w0.178: R26.7@44.729,58.064 44.729,57.429 ; IC2.26@52.917,55.14 51.921,55.14 50.013,57.048 45.11,57.048 44.729,57.429 ; 44.729,57.429 cw(c45.105,57.429) 44.844,57.7 ccw(c45.105,57.429) 44.729,57.429 ; 44.729,57.429 ccw(c44.354,57.429) 44.615,57.7 cw(c44.354,57.429) 44.729,57.429
LEDLINK: IC2.28 J5.4 R26.5 | length 64.5
  Top Layer w0.178: R26.5@43.104,58.064 43.104,57.531 ; IC2.28@52.917,54.14 51.916,54.14 49.718,56.337 44.018,56.337 43.104,57.252 43.104,57.531 ; R26.5@43.021,57.676 cw(c42.936,57.531) 43.104,57.531 ; R26.5@43.021,57.676 cw(c42.936,57.531) 43.104,57.531 ; R26.5@43.021,57.676 cw(c42.936,57.531) 43.104,57.531 ; R26.5@43.021,57.676 cw(c42.936,57.531) 43.104,57.531 ; 43.104,57.42 cw(c43.502,57.42) 43.221,57.702 ccw(c43.502,57.42) 43.104,57.42 ; 43.104,57.42 ccw(c42.705,57.42) 42.987,57.702 cw(c42.705,57.42) 43.104,57.42 ; 43.104,57.531 cw(c43.271,57.531) R26.5@43.187,57.676 ; 43.104,57.531 cw(c43.271,57.531) R26.5@43.187,57.676 ; 43.104,57.531 cw(c43.271,57.531) R26.5@43.187,57.676 ; 43.104,57.531 cw(c43.271,57.531) R26.5@43.187,57.676
  Top Layer w0.254: v2@41.67,57.333 ccw(c41.889,57.466) 42.018,57.244 ; 43.104,57.531 42.926,57.353 ; v2(41.453,57.201) cw(c41.821,56.833) 41.821,57.353 ccw(c41.821,56.833) v2(41.453,57.201) ; v2(41.453,57.201) 41.758,57.201 41.91,57.353 ; 41.91,57.353 ccw(c41.91,57.147) 41.705,57.171 cw(c41.91,57.147) 41.91,57.353 ; 41.91,57.353 42.926,57.353 ; 42.926,57.353 ccw(c42.678,57.601) 42.991,57.761 cw(c42.678,57.601) 42.926,57.353 ; v2@41.632,57.021 cw(c42.434,56.22) 42.434,57.353 ccw(c42.434,56.22) v2@41.632,57.021
  Bottom Layer w0.254: J5.4@4,57.38 4.531,56.849 4.789,56.591 ; 40.888,57.158 cw(c41.016,56.935) v2@41.236,57.069 ; v2@41.351,57.048 35.382,57.048 35.183,56.849 34.925,56.591 4.789,56.591 ; 4.789,56.591 cw(c5.275,57.077) 4.606,57.236 ccw(c5.275,57.077) 4.789,56.591 ; 4.789,56.591 ccw(c4.303,56.105) 4.144,56.774 cw(c4.303,56.105) 4.789,56.591 ; 40.472,57.048 ccw(c40.472,58.182) 41.273,57.38 cw(c40.472,58.182) 40.472,57.048 ; 41.085,57.048 ccw(c41.085,57.569) v2(41.453,57.201) cw(c41.085,57.569) 41.085,57.048
LEDSPEED: IC2.27 J5.3 R26.6 | length 77.7
  Top Layer w0.178: v2@41.772,58.384 cw(c42.238,58.274) 42.114,58.736 ; v2(41.834,58.369) 41.885,58.369 41.885,58.395 42.545,59.055 43.561,59.055 43.917,58.699 ; v2@41.845,58.307 ccw(c41.77,58.74) 42.195,58.626 ; IC2.27@52.917,54.64 51.919,54.64 49.865,56.693 44.628,56.693 43.917,57.404 R26.6@43.917,58.064 43.917,58.699 ; 43.917,57.42 cw(c44.315,57.42) 44.033,57.702 ccw(c44.315,57.42) 43.917,57.42 ; 43.917,57.42 ccw(c43.518,57.42) 43.8,57.702 cw(c43.518,57.42) 43.917,57.42 ; 43.917,58.699 cw(c43.541,58.699) 43.802,58.429 ccw(c43.541,58.699) 43.917,58.699 ; 43.917,58.699 ccw(c44.292,58.699) 44.031,58.429 cw(c44.292,58.699) 43.917,58.699 ; v2@41.834,58.661 ccw(c41.834,59.428) 42.376,58.886 cw(c41.834,59.428) v2@41.834,58.661 ; v2@42.126,58.369 cw(c42.77,58.369) 42.314,58.824 ccw(c42.77,58.369) v2@42.126,58.369
  Bottom Layer w0.254: J5.3@3.864,59.892 ccw(c4.82,60.088) 4.568,59.145 ; J5.3@4,59.92 6.897,57.023 34.602,57.023 35.161,57.582 40.538,57.582 ; J5.3@4.028,60.056 cw(c3.832,59.1) 4.775,59.352 ; 41.324,57.981 ccw(c41.11,58.791) v2(41.834,58.369) ; v2@41.614,58.497 cw(c41.084,58.806) 41.241,58.213 cw(c41.397,57.62) v2@41.706,58.15 ; 4.63,59.29 cw(c5.26,59.92) 4.369,59.92 ccw(c5.26,59.92) 4.63,59.29 ; 4.63,59.29 ccw(c4,58.66) 4,59.551 cw(c4,58.66) 4.63,59.29 ; 5.064,58.856 cw(c6.127,59.92) 4.623,59.92 ccw(c6.127,59.92) 5.064,58.856 ; 5.064,58.856 ccw(c4,57.793) 4,59.297 cw(c4,57.793) 5.064,58.856 ; 40.538,57.582 cw(c41.826,56.294) 41.833,58.115 ccw(c41.826,56.294) 40.538,57.582 ; 40.538,57.582 41.326,58.369 ; 41.326,58.369 cw(c41.326,57.988) 41.631,58.217 ccw(c41.326,57.988) 41.326,58.369 ; 41.326,58.369 ccw(c41.326,58.75) 41.631,58.522 cw(c41.326,58.75) 41.326,58.369 ; 41.326,58.369 v2(41.834,58.369) ; v2(41.834,58.369) ccw(c41.829,57.154) 40.97,58.013 cw(c41.829,57.154) v2(41.834,58.369) ; 41.401,58.445 cw(c41.832,58.013) 41.835,58.623 ccw(c41.832,58.013) 41.401,58.445
MB_RX_N: J3.4 J6.14 U7.5 | length 62.3
  Top Layer w0.178: 58.484,92.43 cw(c59.526,92.205) J6.14@59.188,93.216 ; 58.55,92.735 cw(c59.411,92.549) J6.14@59.131,93.385 ; 58.674,92.496 cw(c59.372,92.345) J6.14@59.252,93.049 ; 58.69,92.224 ccw(c58.465,93.266) J6.14@59.476,92.928 ; 58.756,92.414 ccw(c58.605,93.112) J6.14@59.309,92.991 ; J3.4@58.84,88.236 cw(c57.98,87.29) 59.258,87.29 cw(c60.537,87.29) J3.4@59.677,88.236 ; 58.995,92.289 ccw(c58.809,93.151) J6.14@59.645,92.871 ; J6.14@59.26,93 58.206,91.946 ; U7.5@60.3,84.557 60.3,85.847 ; U7.5@60.528,84.301 U7.5@60.528,85.592 ; 58.206,89.749 cw(c57.51,89.053) J3.4@58.474,88.857 ; 58.206,89.749 ccw(c58.901,90.444) J3.4@59.098,89.481 ; 58.206,89.749 cw(c57.51,89.053) J3.4@58.474,88.857 ; 58.206,89.749 ccw(c58.902,90.445) J3.4@59.098,89.481 ; 58.206,89.749 ccw(c58.902,90.445) J3.4@59.098,89.481 ; 58.206,89.749 cw(c57.51,89.053) J3.4@58.474,88.857 ; 58.206,89.749 ccw(c58.902,90.445) J3.4@59.098,89.481 ; 58.206,89.749 cw(c57.51,89.053) J3.4@58.474,88.857 ; 58.206,89.749 58.206,91.946 ; 58.206,89.749 J3.4@59.258,88.697 ; 58.206,89.749 J3.4@59.258,88.697 ; 58.206,91.946 cw(c59.161,90.991) 59.227,92.34 ccw(c59.161,90.991) 58.206,91.946 ; 58.206,91.946 ccw(c57.251,92.9) 58.6,92.967 cw(c57.251,92.9) 58.206,91.946 ; 58.44,89.515 cw(c57.899,88.974) J3.4@58.648,88.821 ; 58.44,89.515 ccw(c58.981,90.056) J3.4@59.134,89.307 ; 58.44,89.515 ccw(c58.981,90.056) J3.4@59.134,89.306 ; 58.44,89.515 cw(c57.899,88.974) J3.4@58.648,88.821 ; 58.44,89.515 cw(c57.899,88.974) J3.4@58.648,88.821 ; 58.44,89.515 ccw(c58.981,90.056) J3.4@59.134,89.307 ; 58.44,89.515 ccw(c58.981,90.056) J3.4@59.134,89.307 ; 58.44,89.515 cw(c57.899,88.974) J3.4@58.648,88.821 ; 58.489,92.229 cw(c59.187,91.531) 59.236,92.517 ccw(c59.187,91.531) 58.489,92.229 ; 58.489,92.229 ccw(c57.792,92.927) 58.777,92.976 cw(c57.792,92.927) 58.489,92.229 ; J3.4@58.959,88.368 cw(c58.345,87.692) 59.258,87.692 ; J3.4@58.959,88.368 cw(c58.345,87.692) 59.258,87.692 ; J3.4@58.959,88.368 cw(c58.345,87.692) 59.258,87.692 ; 59.258,86.888 cw(c60.902,86.888) 59.796,88.105 ccw(c60.902,86.888) 59.258,86.888 ; 59.258,86.888 ccw(c57.614,86.888) 58.72,88.105 cw(c57.614,86.888) 59.258,86.888 ; 59.258,86.888 J3.4@59.258,88.697 ; 59.258,86.888 60.3,85.847 ; 59.258,87.29 cw(c60.537,87.29) 59.677,88.236 ccw(c60.537,87.29) 59.258,87.29 ; 59.258,87.29 ccw(c57.98,87.29) 58.84,88.236 cw(c57.98,87.29) 59.258,87.29 ; 59.258,87.692 cw(c60.171,87.692) J3.4@59.557,88.368 ; 59.258,87.692 cw(c60.171,87.692) J3.4@59.557,88.368 ; 59.258,87.692 cw(c60.171,87.692) J3.4@59.557,88.368 ; 60.3,85.847 cw(c60.069,85.847) 60.167,85.638 ccw(c60.069,85.847) 60.3,85.847 ; 60.3,85.847 ccw(c60.53,85.847) 60.432,85.638 cw(c60.53,85.847) 60.3,85.847 ; 58.439,89.441 ccw(c60.001,89.536) 58.963,88.364 cw(c60.001,89.536) 58.439,89.441 ; 58.514,89.516 cw(c58.419,87.954) 59.591,88.992 ccw(c58.419,87.954) 58.514,89.516
MB_RX_P: J3.3 J6.13 U7.8 | length 68.8
  Top Layer w0.178: J6.13@56.335,92.871 ccw(c57.171,93.151) 56.985,92.289 ; 56.375,85.755 ccw(c56.66,85.587) U7.8@56.463,85.321 ; U7.8@56.409,85.657 ccw(c56.328,85.958) 56.598,85.802 ; 56.475,85.926 ccw(c56.779,85.747) U7.8@56.569,85.464 ; U7.8@56.49,84.557 56.718,84.785 J3.3@56.718,88.697 ; J6.13@56.504,92.928 ccw(c57.515,93.266) 57.29,92.224 ; 56.575,86.096 ccw(c56.897,85.907) U7.8@56.675,85.607 ; 56.643,85.881 ccw(c56.842,85.766) U7.8@56.692,85.592 ; J6.13@56.671,92.991 ccw(c57.375,93.112) 57.224,92.414 ; J6.13@56.72,93 57.774,91.946 57.774,89.753 J3.3@56.718,88.697 ; J6.13@56.728,93.049 cw(c56.608,92.345) 57.306,92.496 ; J6.13@56.792,93.216 cw(c56.454,92.205) 57.496,92.43 ; J6.13@56.849,93.385 cw(c56.569,92.549) 57.43,92.735 ; 57.774,89.753 J3.3@56.718,88.697 ; J3.3@56.278,88.257 cw(c55.216,87.194) 56.718,87.194 ; J3.3@56.278,88.257 cw(c55.216,87.194) 56.718,87.194 ; J3.3@56.278,88.257 cw(c55.216,87.194) 56.718,87.194 ; J3.3@56.404,88.382 cw(c55.645,87.624) 56.718,87.624 ; J3.3@56.404,88.382 cw(c55.645,87.624) 56.718,87.624 ; J3.3@56.404,88.382 cw(c55.645,87.624) 56.718,87.624 ; 56.718,86.765 cw(c58.65,86.765) 57.284,88.131 ccw(c58.65,86.765) 56.718,86.765 ; 56.718,86.765 ccw(c54.787,86.765) 56.152,88.131 cw(c54.787,86.765) 56.718,86.765 ; 56.718,87.194 cw(c58.221,87.194) J3.3@57.158,88.257 ; 56.718,87.194 cw(c58.221,87.194) J3.3@57.158,88.257 ; 56.718,87.194 cw(c58.221,87.194) J3.3@57.158,88.257 ; 56.718,87.624 cw(c57.791,87.624) J3.3@57.033,88.382 ; 56.718,87.624 cw(c57.791,87.624) J3.3@57.033,88.382 ; 56.718,87.624 cw(c57.791,87.624) J3.3@57.033,88.382 ; J3.3@56.841,89.307 ccw(c56.993,90.064) 57.539,89.518 ; J3.3@56.841,89.307 ccw(c56.993,90.064) 57.539,89.518 ; J3.3@56.841,89.307 ccw(c56.993,90.064) 57.539,89.518 ; J3.3@56.841,89.307 ccw(c56.993,90.064) 57.539,89.518 ; J3.3@56.876,89.481 ccw(c57.072,90.455) 57.774,89.753 ; J3.3@56.876,89.481 ccw(c57.072,90.455) 57.774,89.753 ; J3.3@56.876,89.481 ccw(c57.072,90.455) 57.774,89.753 ; J3.3@56.876,89.481 ccw(c57.072,90.455) 57.774,89.753 ; J3.3@57.328,88.819 cw(c58.086,88.972) 57.539,89.518 ; J3.3@57.328,88.819 cw(c58.086,88.972) 57.539,89.518 ; J3.3@57.328,88.819 cw(c58.086,88.972) 57.539,89.518 ; J3.3@57.328,88.819 cw(c58.086,88.972) 57.539,89.518 ; 57.491,92.229 cw(c58.188,92.927) 57.203,92.976 ccw(c58.188,92.927) 57.491,92.229 ; 57.491,92.229 ccw(c56.793,91.531) 56.744,92.517 cw(c56.793,91.531) 57.491,92.229 ; J3.3@57.503,88.854 cw(c58.476,89.05) 57.774,89.753 ; J3.3@57.503,88.854 cw(c58.476,89.05) 57.774,89.753 ; J3.3@57.503,88.854 cw(c58.476,89.05) 57.774,89.753 ; J3.3@57.503,88.854 cw(c58.476,89.05) 57.774,89.753 ; 57.774,91.946 cw(c58.729,92.9) 57.38,92.967 ccw(c58.729,92.9) 57.774,91.946 ; 57.774,91.946 ccw(c56.819,90.991) 56.753,92.34 cw(c56.819,90.991) 57.774,91.946 ; U7.8@56.27,85.577 ccw(c55.187,86.66) 56.718,86.66 cw(c55.187,86.66) U7.8@56.27,85.577 ; J3.3@56.385,88.991 cw(c57.559,87.956) 57.46,89.518 ccw(c57.56,87.956) J3.3@56.385,88.991 ; U7.8@56.395,85.451 ccw(c55.616,86.23) 56.718,86.23 cw(c55.616,86.23) U7.8@56.395,85.451 ; U7.8@56.521,85.325 ccw(c56.045,85.801) 56.718,85.801 cw(c56.045,85.801) U7.8@56.521,85.325 ; J3.3@57.012,88.363 ccw(c55.977,89.538) 57.54,89.439 cw(c55.977,89.538) J3.3@57.012,88.363
MB_TX_N: J3.2 J6.12 U5.5 | length 64.9
  Top Layer w0.178: 53.404,92.43 cw(c54.446,92.205) J6.12@54.108,93.216 ; 53.47,92.735 cw(c54.331,92.549) J6.12@54.051,93.385 ; 53.594,92.496 cw(c54.292,92.345) J6.12@54.172,93.049 ; 53.61,92.224 ccw(c53.385,93.266) J6.12@54.396,92.928 ; 53.676,92.414 ccw(c53.525,93.112) J6.12@54.229,92.991 ; 53.915,92.289 ccw(c53.729,93.151) J6.12@54.565,92.871 ; J6.12@54.18,93 53.126,91.946 ; U5.5@54.305,84.557 54.178,84.684 J3.2@54.178,88.697 ; 53.126,89.749 cw(c52.43,89.053) J3.2@53.394,88.857 ; 53.126,89.749 ccw(c53.821,90.444) J3.2@54.018,89.481 ; 53.126,89.749 cw(c52.43,89.053) J3.2@53.394,88.857 ; 53.126,89.749 ccw(c53.822,90.445) J3.2@54.018,89.481 ; 53.126,89.749 ccw(c53.822,90.445) J3.2@54.018,89.481 ; 53.126,89.749 cw(c52.43,89.053) J3.2@53.394,88.857 ; 53.126,89.749 ccw(c53.822,90.445) J3.2@54.018,89.481 ; 53.126,89.749 cw(c52.43,89.053) J3.2@53.394,88.857 ; 53.126,89.749 J3.2@54.178,88.697 ; 53.126,89.749 53.126,91.946 ; 53.126,89.749 J3.2@54.178,88.697 ; 53.126,91.946 cw(c54.081,90.991) 54.147,92.34 ccw(c54.081,90.991) 53.126,91.946 ; 53.126,91.946 ccw(c52.171,92.9) 53.52,92.967 cw(c52.171,92.9) 53.126,91.946 ; 53.36,89.515 cw(c52.819,88.974) J3.2@53.568,88.821 ; 53.36,89.515 ccw(c53.901,90.056) J3.2@54.054,89.307 ; 53.36,89.515 ccw(c53.901,90.056) J3.2@54.054,89.306 ; 53.36,89.515 cw(c52.819,88.974) J3.2@53.568,88.821 ; 53.36,89.515 cw(c52.819,88.974) J3.2@53.568,88.821 ; 53.36,89.515 ccw(c53.901,90.056) J3.2@54.054,89.307 ; 53.36,89.515 ccw(c53.901,90.056) J3.2@54.054,89.307 ; 53.36,89.515 cw(c52.819,88.974) J3.2@53.568,88.821 ; 53.409,92.229 cw(c54.107,91.531) 54.156,92.517 ccw(c54.107,91.531) 53.409,92.229 ; 53.409,92.229 ccw(c52.712,92.927) 53.697,92.976 cw(c52.712,92.927) 53.409,92.229 ; J3.2@53.738,88.257 cw(c52.676,87.194) 54.178,87.194 ; J3.2@53.738,88.257 cw(c52.676,87.194) 54.178,87.194 ; J3.2@53.738,88.257 cw(c52.676,87.194) 54.178,87.194 ; J3.2@53.864,88.382 cw(c53.105,87.624) 54.178,87.624 ; J3.2@53.864,88.382 cw(c53.105,87.624) 54.178,87.624 ; J3.2@53.864,88.382 cw(c53.105,87.624) 54.178,87.624 ; 54.178,86.765 cw(c56.11,86.765) 54.744,88.131 ccw(c56.11,86.765) 54.178,86.765 ; 54.178,86.765 ccw(c52.247,86.765) 53.612,88.131 cw(c52.247,86.765) 54.178,86.765 ; 54.178,87.194 cw(c55.681,87.194) J3.2@54.618,88.257 ; 54.178,87.194 cw(c55.681,87.194) J3.2@54.618,88.257 ; 54.178,87.194 cw(c55.681,87.194) J3.2@54.618,88.257 ; 54.178,87.624 cw(c55.251,87.624) J3.2@54.493,88.382 ; 54.178,87.624 cw(c55.251,87.624) J3.2@54.493,88.382 ; 54.178,87.624 cw(c55.251,87.624) J3.2@54.493,88.382 ; 53.359,89.441 ccw(c54.921,89.536) 53.883,88.364 cw(c54.921,89.536) 53.359,89.441 ; 53.434,89.516 cw(c53.339,87.954) 54.511,88.992 ccw(c53.339,87.954) 53.434,89.516 ; U5.5@54.085,85.577 ccw(c53.861,85.801) 54.178,85.801 cw(c53.861,85.801) U5.5@54.085,85.577 ; 54.178,85.985 ccw(c54.934,85.985) 54.399,85.451 cw(c54.934,85.985) 54.178,85.985 ; 54.178,86.414 ccw(c55.363,86.414) 54.525,85.577 cw(c55.363,86.414) 54.178,86.414
MB_TX_P: J3.1 J6.11 U5.8 | length 55
  Top Layer w0.178: U5.8@50.368,84.301 U5.8@50.368,84.557 ; U5.8@50.495,84.557 50.495,85.847 ; J6.11@51.255,92.871 ccw(c52.091,93.151) 51.905,92.289 ; J6.11@51.424,92.928 ccw(c52.435,93.266) 52.21,92.224 ; J6.11@51.591,92.991 ccw(c52.295,93.112) 52.144,92.414 ; J6.11@51.64,93 52.694,91.946 52.694,89.753 J3.1@51.638,88.697 ; J6.11@51.648,93.049 cw(c51.528,92.345) 52.226,92.496 ; J6.11@51.712,93.216 cw(c51.374,92.205) 52.416,92.43 ; J6.11@51.769,93.385 cw(c51.489,92.549) 52.35,92.735 ; 52.694,89.753 J3.1@51.638,88.697 ; 50.495,85.847 cw(c50.265,85.847) 50.363,85.638 ccw(c50.265,85.847) 50.495,85.847 ; 50.495,85.847 ccw(c50.726,85.847) 50.628,85.638 cw(c50.726,85.847) 50.495,85.847 ; 50.495,85.847 51.638,86.99 ; J3.1@51.24,88.218 cw(c50.533,87.369) 51.638,87.369 ; J3.1@51.24,88.218 cw(c50.533,87.369) 51.638,87.369 ; J3.1@51.24,88.218 cw(c50.533,87.369) 51.638,87.369 ; J3.1@51.354,88.355 cw(c50.849,87.749) 51.638,87.749 ; J3.1@51.354,88.355 cw(c50.849,87.748) 51.638,87.748 ; J3.1@51.354,88.355 cw(c50.849,87.749) 51.638,87.749 ; 51.638,86.99 cw(c53.059,86.99) 52.15,88.082 ccw(c53.059,86.99) 51.638,86.99 ; 51.638,86.99 ccw(c50.218,86.99) 51.126,88.082 cw(c50.218,86.99) 51.638,86.99 ; 51.638,86.99 J3.1@51.638,88.697 ; 51.638,87.369 cw(c52.743,87.369) J3.1@52.036,88.218 ; 51.638,87.369 cw(c52.743,87.369) J3.1@52.036,88.218 ; 51.638,87.369 cw(c52.743,87.369) J3.1@52.036,88.218 ; 51.638,87.749 cw(c52.427,87.749) J3.1@51.923,88.355 ; 51.638,87.748 cw(c52.427,87.748) J3.1@51.923,88.355 ; 51.638,87.749 cw(c52.427,87.749) J3.1@51.923,88.355 ; J3.1@51.761,89.307 ccw(c51.913,90.064) J3.1@52.459,89.518 ; J3.1@51.761,89.307 ccw(c51.913,90.064) J3.1@52.459,89.518 ; J3.1@51.761,89.307 ccw(c51.913,90.064) J3.1@52.459,89.518 ; J3.1@51.761,89.307 ccw(c51.913,90.064) J3.1@52.459,89.518 ; J3.1@51.796,89.481 ccw(c51.992,90.455) 52.694,89.753 ; J3.1@51.796,89.481 ccw(c51.992,90.455) 52.694,89.753 ; J3.1@51.796,89.481 ccw(c51.992,90.455) 52.694,89.753 ; J3.1@51.796,89.481 ccw(c51.992,90.455) 52.694,89.753 ; J3.1@52.248,88.819 cw(c53.006,88.972) J3.1@52.459,89.518 ; J3.1@52.248,88.819 cw(c53.006,88.972) J3.1@52.459,89.518 ; J3.1@52.248,88.819 cw(c53.006,88.972) J3.1@52.459,89.518 ; J3.1@52.248,88.819 cw(c53.006,88.972) J3.1@52.459,89.518 ; 52.411,92.229 cw(c53.108,92.927) 52.123,92.976 ccw(c53.108,92.927) 52.411,92.229 ; 52.411,92.229 ccw(c51.713,91.531) 51.664,92.517 cw(c51.713,91.531) 52.411,92.229 ; J3.1@52.423,88.854 cw(c53.396,89.05) 52.694,89.753 ; J3.1@52.423,88.854 cw(c53.396,89.05) 52.694,89.753 ; J3.1@52.423,88.854 cw(c53.396,89.05) 52.694,89.753 ; J3.1@52.423,88.854 cw(c53.396,89.05) 52.694,89.753 ; 52.694,91.946 cw(c53.649,92.9) 52.3,92.967 ccw(c53.649,92.9) 52.694,91.946 ; 52.694,91.946 ccw(c51.739,90.991) 51.673,92.34 cw(c51.739,90.991) 52.694,91.946
MCO1: U1.100
NetC2_2: C2.2 T4.2 | length 19.8
  Top Layer w0.508: C2.2@31.746,85.637 cw(c30.662,84.553) 32.195,84.553 cw(c33.728,84.553) C2.2@32.644,85.637 ; C2.2@31.746,86.043 cw(c30.662,84.959) 32.195,84.959 cw(c33.728,84.959) C2.2@32.644,86.043 ; C2.2@32.195,86.619 32.195,84.049 33.566,82.677 T4.2@38.389,82.677 ; 36.588,82.677 cw(c36.588,80.876) 37.861,82.149 ccw(c36.588,80.876) 36.588,82.677 ; 36.588,82.677 ccw(c36.588,84.478) 37.861,83.205 cw(c36.588,84.478) 36.588,82.677